# Altium PCB scanline.PcbDoc
Units mil, origin at the board's own origin, x right, y up, seen from the top; angles counter-clockwise.
Board outline 3818.9 x 866.14 mil, 2 copper layers (Top Layer, Bottom Layer); 129 components, 112 nets, 332 pads, 113 vias.
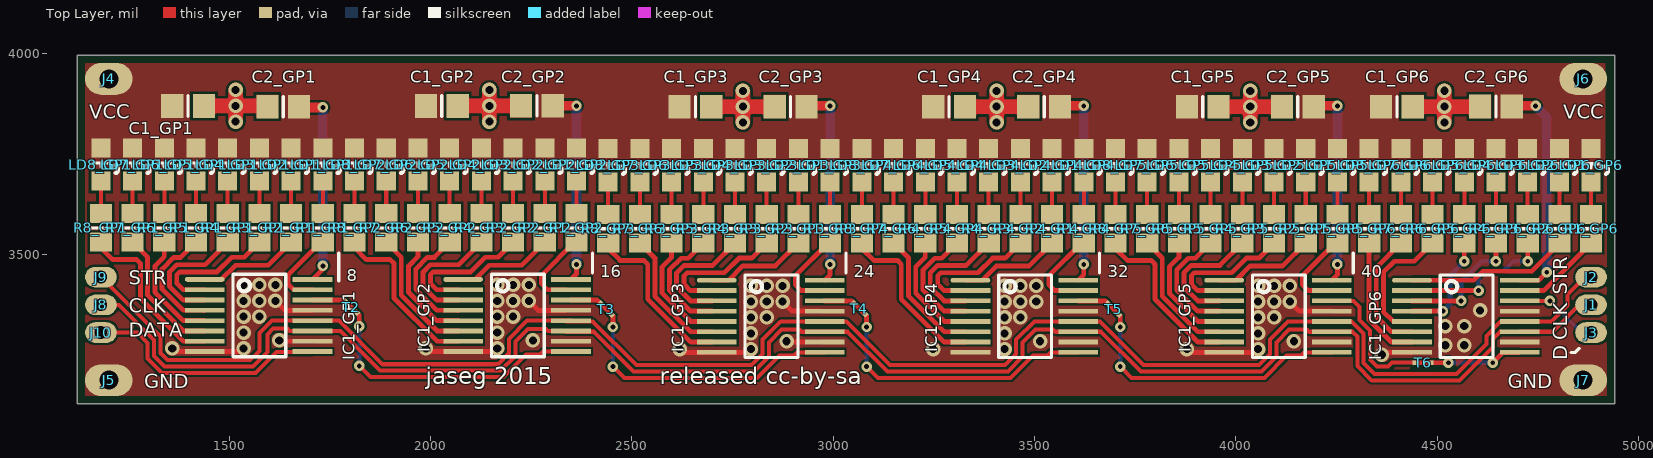
[diagram p0: Top Layer view]
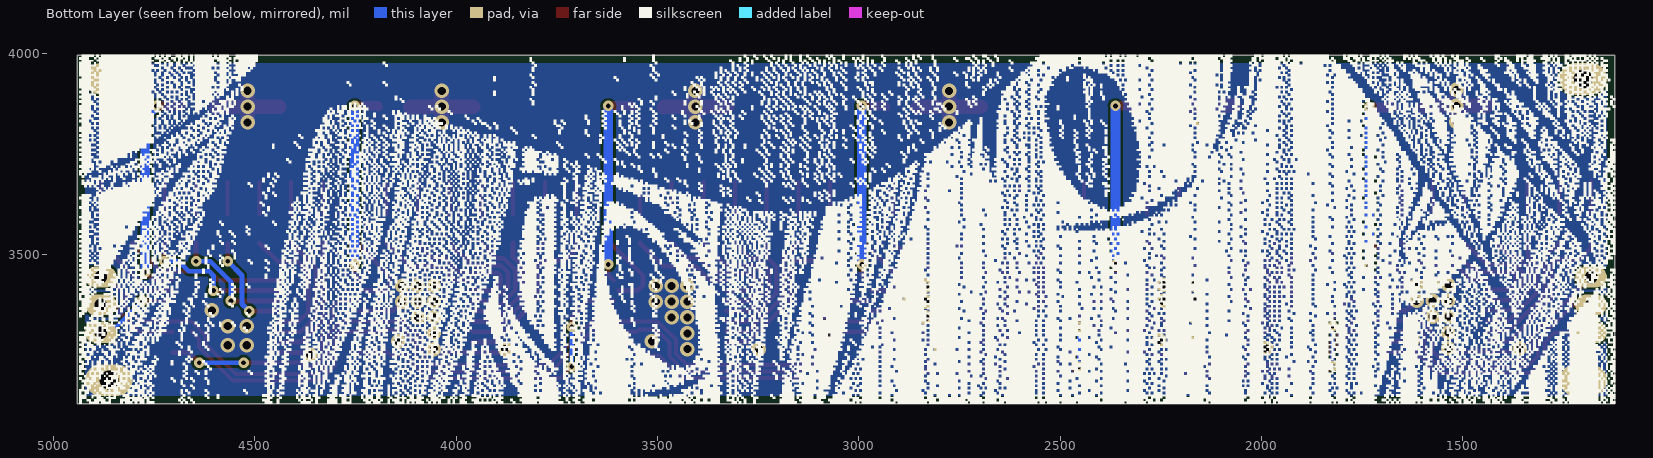
[diagram p1: Bottom Layer view, seen from below]

## Layer stack, top to bottom
Top Solder: solder mask 0.4, Solder Resist, Dk 3.5
Top Layer: signal copper 1.4
Dielectric 1: dielectric 12.6, FR-4, Dk 4.8
Bottom Layer: signal copper 1.4
Bottom Solder: solder mask 0.4, Solder Resist, Dk 3.5

## Board outline
1122.05,3129.92 1122.05,3996.06 4940.94,3996.06 4940.94,3129.92

## Design rules (kind name [scope] priority, off if disabled: settings)
Clearance "VGND Polygon clearance" [InNet('VGND') AND InPoly] p1: gap=20
Clearance [All] p2: gap=6
HoleSize [All] p1: absolutevalues=TRUE maxlimit=250 minlimit=11.81 maxpercent=80.000 minpercent=20.000
MinimumAnnularRing AnnularRing [All] p1: minimumring=6
MinimumSolderMaskSliver [All] p1 off: minsoldermaskwidth=3.94
PolygonConnect [All] p1: connectstyle=Direct reliefconductorwidth=20 reliefentries=4 polygonreliefangle="90 Angle" airgapwidth=6
RoomDefinition GP1 [InComponentClass('GP1')] p1: confinementstyle=ConfineIn formatcopy=FALSE lockcomponents=FALSE outline 1141.73,3149.61 1771.65,3149.61 1771.65,3976.38 1141.73,3976.38
RoomDefinition GP2 [InComponentClass('GP2')] p2: confinementstyle=ConfineIn formatcopy=FALSE lockcomponents=FALSE outline 1771.65,3149.61 2401.57,3149.61 2401.57,3976.38 1771.65,3976.38
RoomDefinition GP3 [InComponentClass('GP3')] p3: confinementstyle=ConfineIn formatcopy=TRUE lockcomponents=FALSE outline 2401.57,3147.64 3031.5,3147.64 3031.5,3974.41 2401.57,3974.41
RoomDefinition GP4 [InComponentClass('GP4')] p4: confinementstyle=ConfineIn formatcopy=TRUE lockcomponents=FALSE outline 3031.5,3147.64 3661.42,3147.64 3661.42,3974.41 3031.5,3974.41
RoomDefinition GP5 [InComponentClass('GP5')] p5: confinementstyle=ConfineIn formatcopy=TRUE lockcomponents=FALSE outline 3661.42,3147.64 4291.34,3147.64 4291.34,3974.41 3661.42,3974.41
RoomDefinition GP6 [InComponentClass('GP6')] p6: confinementstyle=ConfineIn formatcopy=TRUE lockcomponents=FALSE outline 4291.34,3147.64 4921.26,3147.64 4921.26,3974.41 4291.34,3974.41
RoomDefinition scanline [InComponentClass('scanline')] p7: confinementstyle=ConfineIn formatcopy=TRUE lockcomponents=FALSE outline 1141.73,3149.61 4921.26,3149.61 4921.26,3976.38 1141.73,3976.38
RoutingVias [All] p1: holewidth=28 width=50 viastyle="Through Hole" minholewidth=11.81 minwidth=23.62 maxholewidth=250 maxwidth=255.91
SilkToBoardRegionClearance [All] p1 off:
SilkToSilkClearance [All] p1 off: silktosilkclearance=6
SilkToSolderMaskClearance [IsPad] p1 off: minsilkscreentomaskgap=7 clearancetoexposedcopper=TRUE
SolderMaskExpansion [All] p1: expansion=5.12
Width SilkWidth [OnLayer('Top Overlay')] p1: maxlimit=1000 minlimit=6 preferedwidth=10
Width HighCurrentNets [InNetClass('Power')] p2: maxlimit=100 minlimit=10 preferedwidth=32 minimp=50.000000 maximp=50.000000 favimp=50.000000
Width [All] p3: maxlimit=50 minlimit=6 preferedwidth=10 minimp=50.000000 maximp=50.000000 favimp=50.000000
24 further rules are at their usual default settings.

## Classes and differential pairs
component class GP1: C1_GP1 C2_GP1 IC1_GP1 LD1_GP1 LD2_GP1 LD3_GP1 LD4_GP1 LD5_GP1 LD6_GP1 LD7_GP1 LD8_GP1 R1_GP1 R2_GP1 R3_GP1 R4_GP1 R5_GP1 R6_GP1 R7_GP1 R8_GP1
component class GP2: C1_GP2 C2_GP2 IC1_GP2 LD1_GP2 LD2_GP2 LD3_GP2 LD4_GP2 LD5_GP2 LD6_GP2 LD7_GP2 LD8_GP2 R1_GP2 R2_GP2 R3_GP2 R4_GP2 R5_GP2 R6_GP2 R7_GP2 R8_GP2
component class GP3: C1_GP3 C2_GP3 IC1_GP3 LD1_GP3 LD2_GP3 LD3_GP3 LD4_GP3 LD5_GP3 LD6_GP3 LD7_GP3 LD8_GP3 R1_GP3 R2_GP3 R3_GP3 R4_GP3 R5_GP3 R6_GP3 R7_GP3 R8_GP3
component class GP4: C1_GP4 C2_GP4 IC1_GP4 LD1_GP4 LD2_GP4 LD3_GP4 LD4_GP4 LD5_GP4 LD6_GP4 LD7_GP4 LD8_GP4 R1_GP4 R2_GP4 R3_GP4 R4_GP4 R5_GP4 R6_GP4 R7_GP4 R8_GP4
component class GP5: C1_GP5 C2_GP5 IC1_GP5 LD1_GP5 LD2_GP5 LD3_GP5 LD4_GP5 LD5_GP5 LD6_GP5 LD7_GP5 LD8_GP5 R1_GP5 R2_GP5 R3_GP5 R4_GP5 R5_GP5 R6_GP5 R7_GP5 R8_GP5
component class GP6: C1_GP6 C2_GP6 IC1_GP6 LD1_GP6 LD2_GP6 LD3_GP6 LD4_GP6 LD5_GP6 LD6_GP6 LD7_GP6 LD8_GP6 R1_GP6 R2_GP6 R3_GP6 R4_GP6 R5_GP6 R6_GP6 R7_GP6 R8_GP6
channel class led-group: GP1 GP2 GP3 GP4 GP5 GP6 GP7 GP8 GP9 GP10 GP11 GP12 GP13
component class scanline: J1 J2 J3 J4 J5 J6 J7 J8 J9 J10 T2 T3 T4 T5 T6
net class C[1..6]: C1 C2 C3 C4 C5 C6
net class K[1..6]: K1 K2 K3 K4 K5 K6

## Components (designator, comment, footprint, x,y, rotation, side; value= is the part's Value field where it differs from the comment)
C1_GP1 "Cap" 6-0805_M 1397.8,3869.95 r180 top (schematic designator C1)
C1_GP2 "Cap" 6-0805_M 2027.72,3869.95 r180 top (schematic designator C1)
C1_GP3 "Cap" 6-0805_M 2657.64,3867.98 r180 top (schematic designator C1)
C1_GP4 "Cap" 6-0805_M 3287.56,3867.98 r180 top (schematic designator C1)
C1_GP5 "Cap" 6-0805_M 3917.48,3867.98 r180 top (schematic designator C1)
C1_GP6 "Cap" 6-0805_M 4399.76,3868.11 r180 top (schematic designator C1)
C2_GP1 "Cap" 6-0805_M 1633.86,3868.11 r0 top (schematic designator C2)
C2_GP2 "Cap" 6-0805_M 2263.78,3870.08 r0 top (schematic designator C2)
C2_GP3 "Cap" 6-0805_M 2893.7,3868.11 r0 top (schematic designator C2)
C2_GP4 "Cap" 6-0805_M 3523.62,3868.11 r0 top (schematic designator C2)
C2_GP5 "Cap" 6-0805_M 4153.54,3868.11 r0 top (schematic designator C2)
C2_GP6 "Cap" 6-0805_M 4645.67,3868.24 r0 top (schematic designator C2)
IC1_GP1 "74HC595" TSSOP16 1427.17,3438.98 r0 top (schematic designator IC1)
IC1_GP2 "74HC595" TSSOP16 2068.9,3438.98 r0 top (schematic designator IC1)
IC1_GP3 "74HC595" TSSOP16 2698.82,3437.01 r0 top (schematic designator IC1)
IC1_GP4 "74HC595" TSSOP16 3328.74,3437.01 r0 top (schematic designator IC1)
IC1_GP5 "74HC595" TSSOP16 3958.66,3437.01 r0 top (schematic designator IC1)
IC1_GP6 "74HC595" TSSOP16 4425.2,3437.01 r0 top (schematic designator IC1)
J1 "CLK" CONN_PAD#1 4881.89,3362.2 r90 top
J2 "STR" CONN_PAD#2 4881.89,3429.13 r90 top
J3 "D" CONN_PAD#3 4881.89,3275.59 r90 top
J4 "DATA" CONN_PAD#4 1200.79,3937.01 r270 top
J5 "GND" CONN_PAD#4 1200.79,3188.98 r270 top
J6 "VCC" CONN_PAD#4 4862.2,3937.01 r90 top
J7 "GND" CONN_PAD#4 4862.2,3188.98 r90 top
J8 "CLK" CONN_PAD#5 1181.1,3375.98 r90 top
J9 "STR" CONN_PAD#5 1181.1,3444.88 r90 top
J10 "VCC" CONN_PAD#5 1181.1,3307.09 r270 top
LD1_GP1 "UV-LED" 0805-LED 1732.28,3724.41 r270 top (schematic designator LD1)
LD1_GP2 "UV-LED" 0805-LED 2362.2,3724.41 r270 top (schematic designator LD1)
LD1_GP3 "UV-LED" 0805-LED 2992.13,3722.44 r270 top (schematic designator LD1)
LD1_GP4 "UV-LED" 0805-LED 3622.05,3722.44 r270 top (schematic designator LD1)
LD1_GP5 "UV-LED" 0805-LED 4251.97,3722.44 r270 top (schematic designator LD1)
LD1_GP6 "UV-LED" 0805-LED 4881.89,3722.44 r270 top (schematic designator LD1)
LD2_GP1 "UV-LED" 0805-LED 1653.54,3724.41 r270 top (schematic designator LD2)
LD2_GP2 "UV-LED" 0805-LED 2283.46,3724.41 r270 top (schematic designator LD2)
LD2_GP3 "UV-LED" 0805-LED 2913.39,3722.44 r270 top (schematic designator LD2)
LD2_GP4 "UV-LED" 0805-LED 3543.31,3722.44 r270 top (schematic designator LD2)
LD2_GP5 "UV-LED" 0805-LED 4173.23,3722.44 r270 top (schematic designator LD2)
LD2_GP6 "UV-LED" 0805-LED 4803.15,3722.44 r270 top (schematic designator LD2)
LD3_GP1 "UV-LED" 0805-LED 1574.8,3724.41 r270 top (schematic designator LD3)
LD3_GP2 "UV-LED" 0805-LED 2204.72,3724.41 r270 top (schematic designator LD3)
LD3_GP3 "UV-LED" 0805-LED 2834.65,3722.44 r270 top (schematic designator LD3)
LD3_GP4 "UV-LED" 0805-LED 3464.57,3722.44 r270 top (schematic designator LD3)
LD3_GP5 "UV-LED" 0805-LED 4094.49,3722.44 r270 top (schematic designator LD3)
LD3_GP6 "UV-LED" 0805-LED 4724.41,3722.44 r270 top (schematic designator LD3)
LD4_GP1 "UV-LED" 0805-LED 1496.06,3724.41 r270 top (schematic designator LD4)
LD4_GP2 "UV-LED" 0805-LED 2125.98,3724.41 r270 top (schematic designator LD4)
LD4_GP3 "UV-LED" 0805-LED 2755.91,3722.44 r270 top (schematic designator LD4)
LD4_GP4 "UV-LED" 0805-LED 3385.83,3722.44 r270 top (schematic designator LD4)
LD4_GP5 "UV-LED" 0805-LED 4015.75,3722.44 r270 top (schematic designator LD4)
LD4_GP6 "UV-LED" 0805-LED 4645.67,3722.44 r270 top (schematic designator LD4)
LD5_GP1 "UV-LED" 0805-LED 1417.32,3724.41 r270 top (schematic designator LD5)
LD5_GP2 "UV-LED" 0805-LED 2047.24,3724.41 r270 top (schematic designator LD5)
LD5_GP3 "UV-LED" 0805-LED 2677.17,3722.44 r270 top (schematic designator LD5)
LD5_GP4 "UV-LED" 0805-LED 3307.09,3722.44 r270 top (schematic designator LD5)
LD5_GP5 "UV-LED" 0805-LED 3937.01,3722.44 r270 top (schematic designator LD5)
LD5_GP6 "UV-LED" 0805-LED 4566.93,3722.44 r270 top (schematic designator LD5)
LD6_GP1 "UV-LED" 0805-LED 1338.58,3724.41 r270 top (schematic designator LD6)
LD6_GP2 "UV-LED" 0805-LED 1968.5,3724.41 r270 top (schematic designator LD6)
LD6_GP3 "UV-LED" 0805-LED 2598.43,3722.44 r270 top (schematic designator LD6)
LD6_GP4 "UV-LED" 0805-LED 3228.35,3722.44 r270 top (schematic designator LD6)
LD6_GP5 "UV-LED" 0805-LED 3858.27,3722.44 r270 top (schematic designator LD6)
LD6_GP6 "UV-LED" 0805-LED 4488.19,3722.44 r270 top (schematic designator LD6)
LD7_GP1 "UV-LED" 0805-LED 1259.84,3724.41 r270 top (schematic designator LD7)
LD7_GP2 "UV-LED" 0805-LED 1889.76,3724.41 r270 top (schematic designator LD7)
LD7_GP3 "UV-LED" 0805-LED 2519.68,3722.44 r270 top (schematic designator LD7)
LD7_GP4 "UV-LED" 0805-LED 3149.61,3722.44 r270 top (schematic designator LD7)
LD7_GP5 "UV-LED" 0805-LED 3779.53,3722.44 r270 top (schematic designator LD7)
LD7_GP6 "UV-LED" 0805-LED 4409.45,3722.44 r270 top (schematic designator LD7)
LD8_GP1 "UV-LED" 0805-LED 1181.1,3724.41 r270 top (schematic designator LD8)
LD8_GP2 "UV-LED" 0805-LED 1811.02,3724.41 r270 top (schematic designator LD8)
LD8_GP3 "UV-LED" 0805-LED 2440.94,3722.44 r270 top (schematic designator LD8)
LD8_GP4 "UV-LED" 0805-LED 3070.87,3722.44 r270 top (schematic designator LD8)
LD8_GP5 "UV-LED" 0805-LED 3700.79,3722.44 r270 top (schematic designator LD8)
LD8_GP6 "UV-LED" 0805-LED 4330.71,3722.44 r270 top (schematic designator LD8)
R1_GP1 "" 6-0805_N 1732.28,3566.93 r90 top (schematic designator R1)
R1_GP2 "" 6-0805_N 2362.2,3566.93 r90 top (schematic designator R1)
R1_GP3 "" 6-0805_N 2992.13,3564.96 r90 top (schematic designator R1)
R1_GP4 "" 6-0805_N 3622.05,3564.96 r90 top (schematic designator R1)
R1_GP5 "" 6-0805_N 4251.97,3564.96 r90 top (schematic designator R1)
R1_GP6 "" 6-0805_N 4881.89,3564.96 r90 top (schematic designator R1)
R2_GP1 "" 6-0805_N 1653.54,3566.93 r90 top (schematic designator R2)
R2_GP2 "" 6-0805_N 2283.46,3566.93 r90 top (schematic designator R2)
R2_GP3 "" 6-0805_N 2913.39,3564.96 r90 top (schematic designator R2)
R2_GP4 "" 6-0805_N 3543.31,3564.96 r90 top (schematic designator R2)
R2_GP5 "" 6-0805_N 4173.23,3564.96 r90 top (schematic designator R2)
R2_GP6 "" 6-0805_N 4803.15,3564.96 r90 top (schematic designator R2)
R3_GP1 "" 6-0805_N 1574.8,3566.93 r90 top (schematic designator R3)
R3_GP2 "" 6-0805_N 2204.72,3566.93 r90 top (schematic designator R3)
R3_GP3 "" 6-0805_N 2834.65,3564.96 r90 top (schematic designator R3)
R3_GP4 "" 6-0805_N 3464.57,3564.96 r90 top (schematic designator R3)
R3_GP5 "" 6-0805_N 4094.49,3564.96 r90 top (schematic designator R3)
R3_GP6 "" 6-0805_N 4724.41,3564.96 r90 top (schematic designator R3)
R4_GP1 "" 6-0805_N 1496.06,3566.93 r90 top (schematic designator R4)
R4_GP2 "" 6-0805_N 2125.98,3566.93 r90 top (schematic designator R4)
R4_GP3 "" 6-0805_N 2755.91,3564.96 r90 top (schematic designator R4)
R4_GP4 "" 6-0805_N 3385.83,3564.96 r90 top (schematic designator R4)
R4_GP5 "" 6-0805_N 4015.75,3564.96 r90 top (schematic designator R4)
R4_GP6 "" 6-0805_N 4645.67,3564.96 r90 top (schematic designator R4)
R5_GP1 "" 6-0805_N 1417.32,3566.93 r90 top (schematic designator R5)
R5_GP2 "" 6-0805_N 2047.24,3566.93 r90 top (schematic designator R5)
R5_GP3 "" 6-0805_N 2677.17,3564.96 r90 top (schematic designator R5)
R5_GP4 "" 6-0805_N 3307.09,3564.96 r90 top (schematic designator R5)
R5_GP5 "" 6-0805_N 3937.01,3564.96 r90 top (schematic designator R5)
R5_GP6 "" 6-0805_N 4566.93,3564.96 r90 top (schematic designator R5)
R6_GP1 "" 6-0805_N 1338.58,3566.93 r90 top (schematic designator R6)
R6_GP2 "" 6-0805_N 1968.5,3566.93 r90 top (schematic designator R6)
R6_GP3 "" 6-0805_N 2598.43,3564.96 r90 top (schematic designator R6)
R6_GP4 "" 6-0805_N 3228.35,3564.96 r90 top (schematic designator R6)
R6_GP5 "" 6-0805_N 3858.27,3564.96 r90 top (schematic designator R6)
R6_GP6 "" 6-0805_N 4488.19,3564.96 r90 top (schematic designator R6)
R7_GP1 "" 6-0805_N 1259.84,3566.93 r90 top (schematic designator R7)
R7_GP2 "" 6-0805_N 1889.76,3566.93 r90 top (schematic designator R7)
R7_GP3 "" 6-0805_N 2519.68,3564.96 r90 top (schematic designator R7)
R7_GP4 "" 6-0805_N 3149.61,3564.96 r90 top (schematic designator R7)
R7_GP5 "" 6-0805_N 3779.53,3564.96 r90 top (schematic designator R7)
R7_GP6 "" 6-0805_N 4409.45,3564.96 r90 top (schematic designator R7)
R8_GP1 "" 6-0805_N 1181.1,3566.93 r90 top (schematic designator R8)
R8_GP2 "" 6-0805_N 1811.02,3566.93 r90 top (schematic designator R8)
R8_GP3 "" 6-0805_N 2440.94,3564.96 r90 top (schematic designator R8)
R8_GP4 "" 6-0805_N 3070.87,3564.96 r90 top (schematic designator R8)
R8_GP5 "" 6-0805_N 3700.79,3564.96 r90 top (schematic designator R8)
R8_GP6 "" 6-0805_N 4330.71,3564.96 r90 top (schematic designator R8)
T2 "NETTIE" NETTIE 1803.15,3370.08 r315 top net-tie
T3 "NETTIE" NETTIE 2436.02,3365.16 r315 top net-tie
T4 "NETTIE" NETTIE 3064.96,3366.14 r315 top net-tie
T5 "NETTIE" NETTIE 3695.87,3365.16 r315 top net-tie
T6 "NETTIE" NETTIE 4464.57,3232.28 r0 top net-tie

## Footprints (in the part's own frame and the unit in brackets; to place one, negate y for a bottom-side part, rotate by r counter-clockwise, add the part's x,y. Pads: shape width x height; smd on the part's side, far side on the other; paste and mask are expansions set on the pad)
6-0805_M [mm] "Chip Resistor, Body 2.0x1.2mm, IPC Low Density"
  rect 1.4x1.5 smd: 1(-1,0) 2(1,0)
  silkscreen extent 0,-0.65 0,0.65, body extent -1.07,-0.7 1.07,0.7, height 0.7
6-0805_N [mm] "Chip Resistor, Body 2.0x1.2mm, IPC Medium Density"
  rect 1.2x1.4 smd: 1(-0.9,0) 2(0.9,0)
  silkscreen extent 0,-0.6 0,0.6, body extent -1.07,-0.7 1.07,0.7, height 0.7
0805-LED [mm]
  rect 1.2x1.2 smd: A(-1.05,0) K(1.05,0)
  silkscreen extent -0.1,-0.5 0.55,1.07
CONN_PAD#1 [mm]
  oval 1.3x2 hole 0.8: 1(0.35,0)
CONN_PAD#2 [mm]
  oval 1.3x2 hole 0.8: 1(0.4,0)
CONN_PAD#3 [mm]
  oval 1.3x2 hole 0.8: 1(0.8,0)
CONN_PAD#4 [mm]
  oval 2x3 hole 1.2: 1(0,0)
CONN_PAD#5 [mm]
  oval 1.3x2 hole 0.8: 1(0,0)
NETTIE [mil]
  rect 12x12 smd: 1(-19.69,0) 2(19.69,0)
  Top Layer region: -19.69,-6 19.68,-6 19.69,6 -19.68,6
TSSOP16 [mm]
  oval 2.5x0.3 smd: 1(0.3,0)
  rect 2.5x0.3 smd: 2(0.3,-0.65) 3(0.3,-1.3) 4(0.3,-1.95) 5(0.3,-2.6) 6(0.3,-3.25) 7(0.3,-3.9) 8(0.3,-4.55) 9(7.1,-4.55) 10(7.1,-3.9) 11(7.1,-3.25) 12(7.1,-2.6) 13(7.1,-1.95) 14(7.1,-1.3) 15(7.1,-0.65) 16(7.1,0)
  silkscreen extent 2.08,-4.88 5.42,0.33

## Part data
C1_GP1 C1_GP2 C1_GP3 C1_GP4 C1_GP5 C1_GP6 C2_GP1 C2_GP2 C2_GP3 C2_GP4 C2_GP5 C2_GP6: "Capacitor"
IC1_GP1 IC1_GP2 IC1_GP3 IC1_GP4 IC1_GP5 IC1_GP6: library part Component_1, "74HC595 8-bit latched SIPO shift register"
J1 J2 J3 J4 J5 J6 J7 J8 J9 J10: library part CONN_PAD
R1_GP1 R1_GP2 R1_GP3 R1_GP4 R1_GP5 R1_GP6 R2_GP1 R2_GP2 R2_GP3 R2_GP4 R2_GP5 R2_GP6 R3_GP1 R3_GP2 R3_GP3 R3_GP4 R3_GP5 R3_GP6 R4_GP1 R4_GP2 R4_GP3 R4_GP4 R4_GP5 R4_GP6 R5_GP1 R5_GP2 R5_GP3 R5_GP4 R5_GP5 R5_GP6 R6_GP1 R6_GP2 R6_GP3 R6_GP4 R6_GP5 R6_GP6 R7_GP1 R7_GP2 R7_GP3 R7_GP4 R7_GP5 R7_GP6 R8_GP1 R8_GP2 R8_GP3 R8_GP4 R8_GP5 R8_GP6: library part Res2, "Resistor"

## Via types
v1: diameter 36, hole 20, Top Layer to Bottom Layer, tented both sides, 84 vias
v2: diameter 26, hole 12, Top Layer to Bottom Layer, tented both sides, 29 vias

## Nets (pads, with @x,y where several pads share a name; then routed paths per layer and width w, separated by ;. In a path a pad name is that pad's centre, name@x,y a point inside that pad or via, vN(x,y) a via of type N, cw(c..) or ccw(c..) an arc to the next point about the centre after c; other vN are vias at no path point)
C1: IC1_GP1.14 T2.1 | length 84.1
  Top Layer w12: IC1_GP1.14 1785.43,3387.8 T2.1
C2: IC1_GP2.14 T3.1 | length 77.3
  Top Layer w12: IC1_GP2.14 2413.39,3387.8 T3.1
C3: IC1_GP3.14 T4.1 | length 75.1
  Top Layer w12: IC1_GP3.14 3045.28,3385.83 T4.1
C4: IC1_GP4.14 T5.1 | length 76.5
  Top Layer w12: IC1_GP4.14 3675.2,3385.83 T5.1
C5: IC1_GP5.14 T6.1 | length 338.9
  Top Layer w10: IC1_GP5.14 4291.34,3385.83 4307.09,3370.08 4307.09,3338.58 4333.2,3312.46 4333.2,3239.96 4350.19,3222.97 4377.95,3222.97 4387.27,3232.28 T6.1
C6: IC1_GP6.14 J3.1 | length 209.8
  Top Layer w10: IC1_GP6.14 v2(4779.53,3385.83)
  Bottom Layer w10: v2(4779.53,3385.83) 4858.27,3307.09 J3.1
CLK: IC1_GP1.11 IC1_GP2.11 IC1_GP3.11 IC1_GP4.11 IC1_GP5.11 IC1_GP6.11 J1.1 J8.1 | length 4451.4
  Top Layer w10: J8.1 1226.38,3375.98 1313.27,3289.09 1313.27,3249.08 1339.63,3222.72 1558.36,3222.72 1594.49,3258.85 1594.49,3302.5 1608.91,3316.93 1644.15,3316.93 1650.05,3311.02 IC1_GP1.11 1775.59,3311.02 1874.27,3212.35 2173.62,3212.35 2210.35,3249.08 2210.35,3284.83 2241.92,3316.4 2285.96,3316.4 2291.34,3311.02 IC1_GP2.11 ; IC1_GP2.11@2336.61,3309.05 2405.51,3309.05 2504.19,3210.38 2803.55,3210.38 2840.28,3247.11 2840.28,3282.86 2871.85,3314.43 2915.88,3314.43 2921.26,3309.06 IC1_GP3.11 ; IC1_GP3.11@2966.54,3309.05 3035.43,3309.05 3134.11,3210.38 3433.47,3210.38 3470.2,3247.11 3470.2,3282.86 3501.77,3314.43 3545.8,3314.43 3551.18,3309.06 IC1_GP4.11 ; IC1_GP4.11@3596.46,3309.05 3665.35,3309.05 3764.03,3210.38 4063.39,3210.38 4100.12,3247.11 4100.12,3282.86 4131.69,3314.43 4175.72,3314.43 4181.1,3309.06 IC1_GP5.11 4289.37,3309.05 4301.2,3297.22 4301.2,3224.41 4337.14,3188.47 4554.61,3188.47 4637.8,3271.65 4637.8,3291.34 4655.51,3309.05 ; IC1_GP6.11 4785.43,3309.05 4852.36,3375.98 J1.1
GND: C1_GP1.1 C1_GP2.1 C1_GP3.1 C1_GP4.1 C1_GP5.1 C1_GP6.1 C2_GP1.1 C2_GP2.1 C2_GP3.1 C2_GP4.1 C2_GP5.1 C2_GP6.1 IC1_GP1.8 IC1_GP1.10 IC1_GP1.13 IC1_GP2.8 IC1_GP2.10 IC1_GP2.13 IC1_GP3.8 IC1_GP3.10 IC1_GP3.13 IC1_GP4.8 IC1_GP4.10 IC1_GP4.13 IC1_GP5.8 IC1_GP5.10 IC1_GP5.13 IC1_GP6.8 IC1_GP6.10 IC1_GP6.13 J5.1 J7.1 | length 2765.3
  Top Layer w12: v1(1358.27,3267.72) 1366.14,3259.84 IC1_GP1.8 v1@1527.56,3259.84 ; v1(1614.17,3385.83) 1637.8,3362.2 IC1_GP1.13 ; v1(1624.02,3287.4) 1625.98,3285.43 IC1_GP1.10 ; v1(1988.19,3267.72) 1996.06,3259.84 2068.9,3259.84 v1@2157.48,3259.84 ; v1(2244.09,3385.83) 2267.72,3362.2 IC1_GP2.13@2336.61,3362.2 ; v1(2618.11,3265.75) 2625.98,3257.87 2698.82,3257.87 v1@2787.4,3257.87 ; v1(2874.02,3383.86) 2897.64,3360.24 IC1_GP3.13@2966.54,3360.24 ; v1@2885.83,3283.46 IC1_GP3.10@2966.54,3283.46 ; v1(3877.95,3265.75) 3885.83,3257.87 3958.66,3257.87 v1@4047.24,3257.87 ; v1(4133.86,3383.86) 4157.48,3360.24 IC1_GP5.13 ; v1@4368.11,3257.87 IC1_GP6.8
  Top Layer w36: C1_GP1.1 v1(1515.75,3869.95) ; v1(1515.75,3830.71) v1(1515.75,3869.95) ; v1(1515.75,3909.45) v1(1515.75,3869.95) ; C2_GP1.1 1592.65,3869.95 v1(1515.75,3869.95) ; C1_GP2.1 v1(2145.67,3869.95) ; v1(2145.67,3830.71) v1(2145.67,3869.95) ; v1(2145.67,3909.45) v1(2145.67,3869.95) ; C2_GP2.1@2224.41,3868.11 2222.57,3869.95 v1(2145.67,3869.95) ; C1_GP3.1 v1(2775.59,3867.98) ; v1(2775.59,3828.74) v1(2775.59,3867.98) ; v1(2775.59,3907.48) v1(2775.59,3867.98) ; C2_GP3.1@2854.33,3866.14 2852.49,3867.98 v1(2775.59,3867.98) ; C1_GP4.1 v1(3405.51,3867.98) ; v1(3405.51,3828.74) v1(3405.51,3867.98) ; v1(3405.51,3907.48) v1(3405.51,3867.98) ; C2_GP4.1@3484.25,3866.14 3482.41,3867.98 v1(3405.51,3867.98) ; C1_GP5.1 v1(4035.43,3867.98) ; v1(4035.43,3828.74) v1(4035.43,3867.98) ; v1(4035.43,3907.48) v1(4035.43,3867.98) ; C2_GP5.1@4114.17,3866.14 4112.33,3867.98 v1(4035.43,3867.98) ; C1_GP6.1 v1(4517.72,3868.11) ; v1(4517.72,3828.87) v1(4517.72,3868.11) ; v1(4517.72,3907.61) v1(4517.72,3868.11) ; C2_GP6.1@4596.46,3866.27 4594.61,3868.11 v1(4517.72,3868.11)
  other v1: 4362.2,3251.97 2795.28,3265.75 3248.03,3265.75 3425.2,3265.75 4055.12,3265.75 1535.43,3267.72 2165.35,3267.72 4519.69,3275.59 4566.93,3275.59 2883.86,3285.43 3513.78,3285.43 4143.7,3285.43 2253.94,3287.4 2795.28,3305.12 3425.2,3305.12 4055.12,3305.12 1535.43,3307.09 2165.35,3307.09 4519.69,3322.83 4566.93,3322.83 2795.28,3344.49 2834.65,3344.49 3425.2,3344.49 3464.57,3344.49 4055.12,3344.49 4094.49,3344.49 1535.43,3346.46 1574.8,3346.46 2165.35,3346.46 2204.72,3346.46 4606.3,3362.2 2795.28,3383.86 2834.65,3383.86 3425.2,3383.86 3464.57,3383.86 3503.94,3383.86 4055.12,3383.86 4094.49,3383.86 1535.43,3385.83 1574.8,3385.83 2165.35,3385.83 2204.72,3385.83 2795.28,3423.23 2834.65,3423.23 2874.02,3423.23 3425.2,3423.23 3464.57,3423.23 3503.94,3423.23 4055.12,3423.23 4094.49,3423.23 4133.86,3423.23 1535.43,3425.2 1574.8,3425.2 1614.17,3425.2 2165.35,3425.2 2204.72,3425.2 2244.09,3425.2
K1: IC1_GP1.9 J10.1 | length 612
  Top Layer w10: J10.1 1271.65,3307.09 1297.27,3281.47 1297.27,3242.45 1333,3206.72 1564.98,3206.72 1616.67,3258.4 1705.25,3258.4 IC1_GP1.9
K2: IC1_GP2.9 T2.2 | length 697.7
  Top Layer w10: v2(1822.83,3224.41) 1850.9,3196.35 2180.6,3196.35 2236.22,3251.97 2271.65,3251.97 2279.53,3259.84 IC1_GP2.9
  Top Layer w12: T2.2 1822.83,3350.39 v2(1822.83,3322.83)
  Bottom Layer w10: v2(1822.83,3224.41) v2(1822.83,3322.83)
K3: IC1_GP3.9 T3.2 | length 697.7
  Top Layer w10: v2(2452.76,3222.44) 2480.82,3194.38 2810.52,3194.38 2866.14,3250 2901.57,3250 2909.45,3257.87 IC1_GP3.9
  Top Layer w12: T3.2@2446.99,3354.19 2452.76,3348.43 v2(2452.76,3320.87)
  Bottom Layer w10: v2(2452.76,3222.44) v2(2452.76,3320.87)
K4: IC1_GP4.9 T4.2 | length 697.7
  Top Layer w10: v2(3082.68,3222.44) 3110.74,3194.38 3440.44,3194.38 3496.06,3250 3531.5,3250 3539.37,3257.87 IC1_GP4.9
  Top Layer w12: T4.2@3076.91,3354.19 3082.68,3348.43 v2(3082.68,3320.87)
  Bottom Layer w10: v2(3082.68,3222.44) v2(3082.68,3320.87)
K5: IC1_GP5.9 T5.2 | length 697.7
  Top Layer w10: v2(3712.6,3222.44) 3740.66,3194.38 4070.36,3194.38 4125.98,3250 4161.42,3250 4169.29,3257.87 IC1_GP5.9
  Top Layer w12: T5.2@3706.83,3354.19 3712.6,3348.43 v2(3712.6,3320.87)
  Bottom Layer w10: v2(3712.6,3222.44) v2(3712.6,3320.87)
K6: IC1_GP6.9 T6.2 | length 231.1
  Top Layer w12: T6.2 4496.06,3232.28 v2(4527.56,3232.28) ; v2(4637.8,3232.28) 4663.39,3257.87 IC1_GP6.9
  Bottom Layer w12: v2(4527.56,3232.28) v2(4637.8,3232.28)
NetIC1_GP1_1: IC1_GP1.1 R2_GP1.1 | length 252.9
  Top Layer w12: IC1_GP1.1 1480.32,3438.98 1515.75,3474.41 1596.46,3474.41 R2_GP1.1
NetIC1_GP1_2: IC1_GP1.2 R3_GP1.1 | length 336
  Top Layer w12: IC1_GP1.2 1385.27,3413.39 1369.52,3429.13 1369.52,3450.23 1376.95,3457.66 1469.47,3457.66 1505.91,3494.09 1537.4,3494.09 R3_GP1.1
NetIC1_GP1_3: IC1_GP1.3 R4_GP1.1 | length 313
  Top Layer w12: IC1_GP1.3 1385.41,3387.8 1351.11,3422.09 1351.11,3457.27 1369.5,3475.66 1440.23,3475.66 R4_GP1.1
NetIC1_GP1_4: IC1_GP1.4 R5_GP1.1 | length 289.5
  Top Layer w12: R5_GP1.1 1379.49,3493.66 1362.04,3493.66 1333.11,3464.73 1333.11,3414.64 1385.45,3362.3 1437.33,3362.3 1437.43,3362.2 IC1_GP1.4
NetIC1_GP1_5: IC1_GP1.5 R6_GP1.1 | length 287.1
  Top Layer w12: R6_GP1.1 1338.58,3495.66 1315.11,3472.19 1315.11,3407.18 1385.68,3336.61 IC1_GP1.5
NetIC1_GP1_6: IC1_GP1.6 R7_GP1.1 | length 325.8
  Top Layer w12: R7_GP1.1 1297.11,3494.23 1297.11,3399.72 1385.81,3311.02 IC1_GP1.6
NetIC1_GP1_7: IC1_GP1.7 R8_GP1.1 | length 418.5
  Top Layer w12: R8_GP1.1 1181.1,3517.72 1210.63,3488.19 1269.68,3488.19 1279.11,3478.76 1279.11,3392.27 1385.95,3285.43 IC1_GP1.7
NetIC1_GP1_15: IC1_GP1.15 R1_GP1.1 | length 209.7
  Top Layer w12: IC1_GP1.15 1660.19,3413.39 1645.48,3428.1 1645.48,3449.85 1727.12,3531.5 R1_GP1.1
NetIC1_GP2_1: IC1_GP2.1 R2_GP2.1 | length 252.9
  Top Layer w12: IC1_GP2.1@2068.9,3438.98 2110.24,3438.98 2145.67,3474.41 2226.38,3474.41 R2_GP2.1
NetIC1_GP2_2: IC1_GP2.2 R3_GP2.1 | length 336
  Top Layer w12: IC1_GP2.2@2068.9,3413.39 2015.19,3413.39 1999.45,3429.13 1999.45,3450.23 2006.87,3457.66 2099.39,3457.66 2135.83,3494.09 2167.32,3494.09 R3_GP2.1
NetIC1_GP2_3: IC1_GP2.3 R4_GP2.1 | length 313
  Top Layer w12: IC1_GP2.3@2068.9,3387.8 2015.33,3387.8 1981.03,3422.09 1981.03,3457.27 1999.42,3475.66 2070.15,3475.66 R4_GP2.1
NetIC1_GP2_4: IC1_GP2.4 R5_GP2.1 | length 289.5
  Top Layer w12: R5_GP2.1 2009.41,3493.66 1991.96,3493.66 1963.03,3464.73 1963.03,3414.64 2015.37,3362.3 2067.25,3362.3 2067.35,3362.2 IC1_GP2.4@2068.9,3362.2
NetIC1_GP2_5: IC1_GP2.5 R6_GP2.1 | length 287.1
  Top Layer w12: R6_GP2.1 1968.5,3495.66 1945.03,3472.19 1945.03,3407.18 2015.6,3336.61 IC1_GP2.5@2068.9,3336.61
NetIC1_GP2_6: IC1_GP2.6 R7_GP2.1 | length 325.8
  Top Layer w12: R7_GP2.1 1927.03,3494.23 1927.03,3399.72 2015.73,3311.02 IC1_GP2.6@2068.9,3311.02
NetIC1_GP2_7: IC1_GP2.7 R8_GP2.1 | length 418.5
  Top Layer w12: R8_GP2.1 1811.02,3517.72 1840.55,3488.19 1899.61,3488.19 1909.03,3478.76 1909.03,3392.27 2015.87,3285.43 IC1_GP2.7@2068.9,3285.43
NetIC1_GP2_15: IC1_GP2.15 R1_GP2.1 | length 209.7
  Top Layer w12: IC1_GP2.15@2336.61,3413.39 2290.12,3413.39 2275.4,3428.1 2275.4,3449.85 2357.05,3531.5 R1_GP2.1
NetIC1_GP3_1: IC1_GP3.1 R2_GP3.1 | length 252.9
  Top Layer w12: IC1_GP3.1@2698.82,3437.01 2740.16,3437.01 2775.59,3472.44 2856.3,3472.44 R2_GP3.1
NetIC1_GP3_2: IC1_GP3.2 R3_GP3.1 | length 336
  Top Layer w12: IC1_GP3.2@2698.82,3411.42 2645.11,3411.42 2629.37,3427.17 2629.37,3448.26 2636.8,3455.69 2729.32,3455.69 2765.75,3492.13 2797.24,3492.13 R3_GP3.1
NetIC1_GP3_3: IC1_GP3.3 R4_GP3.1 | length 313
  Top Layer w12: IC1_GP3.3@2698.82,3385.83 2645.25,3385.83 2610.95,3420.12 2610.95,3455.31 2629.34,3473.69 2700.07,3473.69 R4_GP3.1
NetIC1_GP3_4: IC1_GP3.4 R5_GP3.1 | length 289.5
  Top Layer w12: R5_GP3.1 2639.33,3491.69 2621.88,3491.69 2592.95,3462.76 2592.95,3412.67 2645.29,3360.33 2697.18,3360.33 2697.27,3360.24 IC1_GP3.4@2698.82,3360.24
NetIC1_GP3_5: IC1_GP3.5 R6_GP3.1 | length 287.1
  Top Layer w12: R6_GP3.1 2598.43,3493.69 2574.95,3470.22 2574.95,3405.21 2645.52,3334.65 IC1_GP3.5@2698.82,3334.65
NetIC1_GP3_6: IC1_GP3.6 R7_GP3.1 | length 325.8
  Top Layer w12: R7_GP3.1 2556.95,3492.26 2556.95,3397.76 2645.65,3309.05 IC1_GP3.6@2698.82,3309.05
NetIC1_GP3_7: IC1_GP3.7 R8_GP3.1 | length 418.5
  Top Layer w12: R8_GP3.1 2440.94,3515.75 2470.47,3486.22 2529.53,3486.22 2538.95,3476.8 2538.95,3390.3 2645.79,3283.46 IC1_GP3.7@2698.82,3283.46
NetIC1_GP3_15: IC1_GP3.15 R1_GP3.1 | length 209.7
  Top Layer w12: IC1_GP3.15@2966.54,3411.42 2920.04,3411.42 2905.32,3426.13 2905.32,3447.88 2986.97,3529.53 R1_GP3.1
NetIC1_GP4_1: IC1_GP4.1 R2_GP4.1 | length 252.9
  Top Layer w12: IC1_GP4.1@3328.74,3437.01 3370.08,3437.01 3405.51,3472.44 3486.22,3472.44 R2_GP4.1
NetIC1_GP4_2: IC1_GP4.2 R3_GP4.1 | length 336
  Top Layer w12: IC1_GP4.2@3328.74,3411.42 3275.04,3411.42 3259.29,3427.17 3259.29,3448.26 3266.72,3455.69 3359.24,3455.69 3395.67,3492.13 3427.17,3492.13 R3_GP4.1
NetIC1_GP4_3: IC1_GP4.3 R4_GP4.1 | length 313
  Top Layer w12: IC1_GP4.3@3328.74,3385.83 3275.17,3385.83 3240.87,3420.12 3240.87,3455.31 3259.26,3473.69 3329.99,3473.69 R4_GP4.1
NetIC1_GP4_4: IC1_GP4.4 R5_GP4.1 | length 289.5
  Top Layer w12: R5_GP4.1 3269.25,3491.69 3251.8,3491.69 3222.87,3462.76 3222.87,3412.67 3275.21,3360.33 3327.1,3360.33 3327.19,3360.24 IC1_GP4.4@3328.74,3360.24
NetIC1_GP4_5: IC1_GP4.5 R6_GP4.1 | length 287.1
  Top Layer w12: R6_GP4.1 3228.35,3493.69 3204.87,3470.22 3204.87,3405.21 3275.44,3334.65 IC1_GP4.5@3328.74,3334.65
NetIC1_GP4_6: IC1_GP4.6 R7_GP4.1 | length 325.8
  Top Layer w12: R7_GP4.1 3186.87,3492.26 3186.87,3397.76 3275.58,3309.05 IC1_GP4.6@3328.74,3309.05
NetIC1_GP4_7: IC1_GP4.7 R8_GP4.1 | length 418.5
  Top Layer w12: R8_GP4.1 3070.87,3515.75 3100.39,3486.22 3159.45,3486.22 3168.87,3476.8 3168.87,3390.3 3275.71,3283.46 IC1_GP4.7@3328.74,3283.46
NetIC1_GP4_15: IC1_GP4.15 R1_GP4.1 | length 209.7
  Top Layer w12: IC1_GP4.15@3596.46,3411.42 3549.96,3411.42 3535.24,3426.13 3535.24,3447.88 3616.89,3529.53 R1_GP4.1
NetIC1_GP5_1: IC1_GP5.1 R2_GP5.1 | length 252.9
  Top Layer w12: IC1_GP5.1@3958.66,3437.01 4000,3437.01 4035.43,3472.44 4116.14,3472.44 R2_GP5.1
NetIC1_GP5_2: IC1_GP5.2 R3_GP5.1 | length 336
  Top Layer w12: IC1_GP5.2@3958.66,3411.42 3904.96,3411.42 3889.21,3427.17 3889.21,3448.26 3896.64,3455.69 3989.16,3455.69 4025.59,3492.13 4057.09,3492.13 R3_GP5.1
NetIC1_GP5_3: IC1_GP5.3 R4_GP5.1 | length 313
  Top Layer w12: IC1_GP5.3@3958.66,3385.83 3905.09,3385.83 3870.8,3420.12 3870.8,3455.31 3889.18,3473.69 3959.91,3473.69 R4_GP5.1
NetIC1_GP5_4: IC1_GP5.4 R5_GP5.1 | length 289.5
  Top Layer w12: R5_GP5.1 3899.17,3491.69 3881.73,3491.69 3852.8,3462.76 3852.8,3412.67 3905.13,3360.33 3957.02,3360.33 3957.11,3360.24 IC1_GP5.4@3958.66,3360.24
NetIC1_GP5_5: IC1_GP5.5 R6_GP5.1 | length 287.1
  Top Layer w12: R6_GP5.1 3858.27,3493.69 3834.8,3470.22 3834.8,3405.21 3905.36,3334.65 IC1_GP5.5@3958.66,3334.65
NetIC1_GP5_6: IC1_GP5.6 R7_GP5.1 | length 325.8
  Top Layer w12: R7_GP5.1 3816.8,3492.26 3816.8,3397.76 3905.5,3309.05 IC1_GP5.6@3958.66,3309.05
NetIC1_GP5_7: IC1_GP5.7 R8_GP5.1 | length 418.5
  Top Layer w12: R8_GP5.1 3700.79,3515.75 3730.31,3486.22 3789.37,3486.22 3798.8,3476.8 3798.8,3390.3 3905.63,3283.46 IC1_GP5.7@3958.66,3283.46
NetIC1_GP5_15: IC1_GP5.15 R1_GP5.1 | length 209.7
  Top Layer w12: IC1_GP5.15@4226.38,3411.42 4179.88,3411.42 4165.17,3426.13 4165.17,3447.88 4246.81,3529.53 R1_GP5.1
NetIC1_GP6_1: IC1_GP6.1 R2_GP6.1 | length 405.6
  Top Layer w12: IC1_GP6.1 4590.55,3437.01 4612.8,3459.25 4734.76,3459.25 4803.15,3527.64 R2_GP6.1
NetIC1_GP6_2: IC1_GP6.2 R3_GP6.1 | length 384.8
  Top Layer w12: IC1_GP6.2 v2(4602.36,3411.42) ; v2(4724.41,3484.25) R3_GP6.1
  Bottom Layer w12: v2(4602.36,3411.42) 4602.36,3448.82 4612.8,3459.25 4663.98,3459.25 4688.98,3484.25 v2(4724.41,3484.25)
NetIC1_GP6_3: IC1_GP6.3 R4_GP6.1 | length 322.4
  Top Layer w12: IC1_GP6.3 v2(4559.06,3385.83) ; v2(4645.67,3484.25) R4_GP6.1
  Bottom Layer w12: v2(4559.06,3385.83) 4559.06,3433.07 4610.24,3484.25 v2(4645.67,3484.25)
NetIC1_GP6_4: IC1_GP6.4 R5_GP6.1 | length 265.3
  Top Layer w12: IC1_GP6.4 v2(4513.78,3360.24) ; v2(4566.93,3484.25) R5_GP6.1
  Bottom Layer w12: v2@4515.75,3362.2 4531.5,3377.95 4531.5,3448.82 v2(4566.93,3484.25)
NetIC1_GP6_5: IC1_GP6.5 R6_GP6.1 | length 330.9
  Top Layer w12: IC1_GP6.5 4390.51,3334.65 4366.14,3359.01 4366.14,3456.69 4393.7,3484.25 4442.91,3484.25 R6_GP6.1
NetIC1_GP6_6: IC1_GP6.6 R7_GP6.1 | length 312.5
  Top Layer w12: R7_GP6.1 4348.14,3468.22 4348.14,3347.03 4386.11,3309.05 IC1_GP6.6
NetIC1_GP6_7: IC1_GP6.7 R8_GP6.1 | length 320.3
  Top Layer w12: R8_GP6.1 4330.14,3528.96 4330.14,3339.57 4386.25,3283.46 IC1_GP6.7
NetIC1_GP6_15: IC1_GP6.15 R1_GP6.1 | length 226.1
  Top Layer w12: IC1_GP6.15 4763.78,3411.42 R1_GP6.1
NetLD1_GP1_K: LD1_GP1.K R1_GP1.2 | length 80.7
  Top Layer w10: R1_GP1.2 LD1_GP1.K
NetLD1_GP2_K: LD1_GP2.K R1_GP2.2 | length 80.7
  Top Layer w10: R1_GP2.2 LD1_GP2.K
NetLD1_GP3_K: LD1_GP3.K R1_GP3.2 | length 80.7
  Top Layer w10: R1_GP3.2 LD1_GP3.K
NetLD1_GP4_K: LD1_GP4.K R1_GP4.2 | length 80.7
  Top Layer w10: R1_GP4.2 LD1_GP4.K
NetLD1_GP5_K: LD1_GP5.K R1_GP5.2 | length 80.7
  Top Layer w10: R1_GP5.2 LD1_GP5.K
NetLD1_GP6_K: LD1_GP6.K R1_GP6.2 | length 80.7
  Top Layer w10: R1_GP6.2 LD1_GP6.K
NetLD2_GP1_K: LD2_GP1.K R2_GP1.2 | length 80.7
  Top Layer w10: R2_GP1.2 LD2_GP1.K
NetLD2_GP2_K: LD2_GP2.K R2_GP2.2 | length 80.7
  Top Layer w10: R2_GP2.2 LD2_GP2.K
NetLD2_GP3_K: LD2_GP3.K R2_GP3.2 | length 80.7
  Top Layer w10: R2_GP3.2 LD2_GP3.K
NetLD2_GP4_K: LD2_GP4.K R2_GP4.2 | length 80.7
  Top Layer w10: R2_GP4.2 LD2_GP4.K
NetLD2_GP5_K: LD2_GP5.K R2_GP5.2 | length 80.7
  Top Layer w10: R2_GP5.2 LD2_GP5.K
NetLD2_GP6_K: LD2_GP6.K R2_GP6.2 | length 80.7
  Top Layer w10: R2_GP6.2 LD2_GP6.K
NetLD3_GP1_K: LD3_GP1.K R3_GP1.2 | length 80.7
  Top Layer w10: R3_GP1.2 LD3_GP1.K
NetLD3_GP2_K: LD3_GP2.K R3_GP2.2 | length 80.7
  Top Layer w10: R3_GP2.2 LD3_GP2.K
NetLD3_GP3_K: LD3_GP3.K R3_GP3.2 | length 80.7
  Top Layer w10: R3_GP3.2 LD3_GP3.K
NetLD3_GP4_K: LD3_GP4.K R3_GP4.2 | length 80.7
  Top Layer w10: R3_GP4.2 LD3_GP4.K
NetLD3_GP5_K: LD3_GP5.K R3_GP5.2 | length 80.7
  Top Layer w10: R3_GP5.2 LD3_GP5.K
NetLD3_GP6_K: LD3_GP6.K R3_GP6.2 | length 80.7
  Top Layer w10: R3_GP6.2 LD3_GP6.K
NetLD4_GP1_K: LD4_GP1.K R4_GP1.2 | length 80.7
  Top Layer w10: R4_GP1.2 LD4_GP1.K
NetLD4_GP2_K: LD4_GP2.K R4_GP2.2 | length 80.7
  Top Layer w10: R4_GP2.2 LD4_GP2.K
NetLD4_GP3_K: LD4_GP3.K R4_GP3.2 | length 80.7
  Top Layer w10: R4_GP3.2 LD4_GP3.K
NetLD4_GP4_K: LD4_GP4.K R4_GP4.2 | length 80.7
  Top Layer w10: R4_GP4.2 LD4_GP4.K
NetLD4_GP5_K: LD4_GP5.K R4_GP5.2 | length 80.7
  Top Layer w10: R4_GP5.2 LD4_GP5.K
NetLD4_GP6_K: LD4_GP6.K R4_GP6.2 | length 80.7
  Top Layer w10: R4_GP6.2 LD4_GP6.K
NetLD5_GP1_K: LD5_GP1.K R5_GP1.2 | length 80.7
  Top Layer w10: R5_GP1.2 LD5_GP1.K
NetLD5_GP2_K: LD5_GP2.K R5_GP2.2 | length 80.7
  Top Layer w10: R5_GP2.2 LD5_GP2.K
NetLD5_GP3_K: LD5_GP3.K R5_GP3.2 | length 80.7
  Top Layer w10: R5_GP3.2 LD5_GP3.K
NetLD5_GP4_K: LD5_GP4.K R5_GP4.2 | length 80.7
  Top Layer w10: R5_GP4.2 LD5_GP4.K
NetLD5_GP5_K: LD5_GP5.K R5_GP5.2 | length 80.7
  Top Layer w10: R5_GP5.2 LD5_GP5.K
NetLD5_GP6_K: LD5_GP6.K R5_GP6.2 | length 80.7
  Top Layer w10: R5_GP6.2 LD5_GP6.K
NetLD6_GP1_K: LD6_GP1.K R6_GP1.2 | length 80.7
  Top Layer w10: R6_GP1.2 LD6_GP1.K
NetLD6_GP2_K: LD6_GP2.K R6_GP2.2 | length 80.7
  Top Layer w10: R6_GP2.2 LD6_GP2.K
NetLD6_GP3_K: LD6_GP3.K R6_GP3.2 | length 80.7
  Top Layer w10: R6_GP3.2 LD6_GP3.K
NetLD6_GP4_K: LD6_GP4.K R6_GP4.2 | length 80.7
  Top Layer w10: R6_GP4.2 LD6_GP4.K
NetLD6_GP5_K: LD6_GP5.K R6_GP5.2 | length 80.7
  Top Layer w10: R6_GP5.2 LD6_GP5.K
NetLD6_GP6_K: LD6_GP6.K R6_GP6.2 | length 80.7
  Top Layer w10: R6_GP6.2 LD6_GP6.K
NetLD7_GP1_K: LD7_GP1.K R7_GP1.2 | length 80.7
  Top Layer w10: R7_GP1.2 LD7_GP1.K
NetLD7_GP2_K: LD7_GP2.K R7_GP2.2 | length 80.7
  Top Layer w10: R7_GP2.2 LD7_GP2.K
NetLD7_GP3_K: LD7_GP3.K R7_GP3.2 | length 80.7
  Top Layer w10: R7_GP3.2 LD7_GP3.K
NetLD7_GP4_K: LD7_GP4.K R7_GP4.2 | length 80.7
  Top Layer w10: R7_GP4.2 LD7_GP4.K
NetLD7_GP5_K: LD7_GP5.K R7_GP5.2 | length 80.7
  Top Layer w10: R7_GP5.2 LD7_GP5.K
NetLD7_GP6_K: LD7_GP6.K R7_GP6.2 | length 80.7
  Top Layer w10: R7_GP6.2 LD7_GP6.K
NetLD8_GP1_K: LD8_GP1.K R8_GP1.2 | length 80.7
  Top Layer w10: R8_GP1.2 LD8_GP1.K
NetLD8_GP2_K: LD8_GP2.K R8_GP2.2 | length 80.7
  Top Layer w10: R8_GP2.2 LD8_GP2.K
NetLD8_GP3_K: LD8_GP3.K R8_GP3.2 | length 80.7
  Top Layer w10: R8_GP3.2 LD8_GP3.K
NetLD8_GP4_K: LD8_GP4.K R8_GP4.2 | length 80.7
  Top Layer w10: R8_GP4.2 LD8_GP4.K
NetLD8_GP5_K: LD8_GP5.K R8_GP5.2 | length 80.7
  Top Layer w10: R8_GP5.2 LD8_GP5.K
NetLD8_GP6_K: LD8_GP6.K R8_GP6.2 | length 80.7
  Top Layer w10: R8_GP6.2 LD8_GP6.K
STR: IC1_GP1.12 IC1_GP2.12 IC1_GP3.12 IC1_GP4.12 IC1_GP5.12 IC1_GP6.12 J2.1 J9.1 | length 4555.7
  Top Layer w10: J9.1 1329.27,3296.72 1329.27,3255.7 1346.26,3238.72 1551.73,3238.72 1574.8,3261.79 1574.8,3305.44 1605.97,3336.61 IC1_GP1.12 1772.63,3336.61 1880.89,3228.35 2167,3228.35 2194.35,3255.7 2194.35,3291.46 2239.51,3336.61 IC1_GP2.12 ; IC1_GP2.12@2336.61,3334.65 2402.55,3334.65 2510.82,3226.38 2796.92,3226.38 2824.28,3253.74 2824.28,3289.49 2869.43,3334.65 3032.47,3334.65 3140.74,3226.38 3426.84,3226.38 3454.2,3253.74 3454.2,3289.49 3499.35,3334.65 3662.39,3334.65 3770.66,3226.38 4056.76,3226.38 4084.12,3253.74 4084.12,3289.49 4129.27,3334.65 IC1_GP5.12 4287.4,3334.65 4317.2,3304.84 4317.2,3231.03 4343.77,3204.47 4547.99,3204.47 4621.8,3278.28 4621.8,3298.96 4657.48,3334.65 IC1_GP6.12 4783.46,3334.65 4822.83,3374.02 4822.83,3401.57 4866.14,3444.88 J2.1
VCC: C1_GP1.2 C1_GP2.2 C1_GP3.2 C1_GP4.2 C1_GP5.2 C1_GP6.2 C2_GP1.2 C2_GP2.2 C2_GP3.2 C2_GP4.2 C2_GP5.2 C2_GP6.2 IC1_GP1.16 IC1_GP2.16 IC1_GP3.16 IC1_GP4.16 IC1_GP5.16 IC1_GP6.16 J4.1 J6.1 LD1_GP1.A LD1_GP2.A LD1_GP3.A LD1_GP4.A LD1_GP5.A LD1_GP6.A LD2_GP1.A LD2_GP2.A LD2_GP3.A LD2_GP4.A LD2_GP5.A LD2_GP6.A LD3_GP1.A LD3_GP2.A LD3_GP3.A LD3_GP4.A LD3_GP5.A LD3_GP6.A LD4_GP1.A LD4_GP2.A LD4_GP3.A LD4_GP4.A LD4_GP5.A LD4_GP6.A LD5_GP1.A LD5_GP2.A LD5_GP3.A LD5_GP4.A LD5_GP5.A LD5_GP6.A LD6_GP1.A LD6_GP2.A LD6_GP3.A LD6_GP4.A LD6_GP5.A LD6_GP6.A LD7_GP1.A LD7_GP2.A LD7_GP3.A LD7_GP4.A LD7_GP5.A LD7_GP6.A LD8_GP1.A LD8_GP2.A LD8_GP3.A LD8_GP4.A LD8_GP5.A LD8_GP6.A | length 3049.1
  Top Layer w12: IC1_GP1.16 1732.28,3464.57 v2(1732.28,3472.44) ; IC1_GP2.16 2362.2,3452.76 v2(2362.2,3476.38) ; IC1_GP3.16 2992.13,3450.79 v2(2992.13,3476.38) ; IC1_GP4.16 3622.05,3450.79 v2(3622.05,3476.38) ; IC1_GP5.16 4251.97,3450.79 v2(4251.97,3476.38) ; IC1_GP6.16 4751.97,3437.01 v2(4771.65,3456.69)
  Top Layer w24: C2_GP1.2 1675.2,3866.14 v2(1732.28,3866.14) ; C2_GP2.2 v2(2362.2,3870.08) ; C2_GP3.2 2935.04,3870.08 v2(2992.13,3870.08) ; C2_GP4.2 3564.96,3870.08 v2(3622.05,3870.08) ; C2_GP5.2 4194.88,3870.08 v2(4251.97,3870.08) ; C2_GP6.2 4686.88,3870.08 v2(4744.09,3870.08)
  Bottom Layer w24: v2(1732.28,3472.44) v2(1732.28,3866.14) ; v2(2362.2,3476.38) v2(2362.2,3870.08) ; v2(2992.13,3476.38) v2(2992.13,3870.08) ; v2(3622.05,3476.38) v2(3622.05,3870.08) ; v2(4251.97,3476.38) v2(4251.97,3870.08) ; v2(4744.09,3870.08) 4771.65,3842.52 v2(4771.65,3456.69)

## Polygon pours and split planes (outlines as drawn)
GND on Top Layer "Top Layer-No Net" (solid, pour order 4): 1141.73,3976.38 1143.7,3974.41 4921.26,3974.41 4921.26,3147.64 4919.29,3149.61 1141.73,3149.61 1141.73,3976.38
VCC on Top Layer "Top Layer-VCC bus bar" (solid, pour order 2): 1141.73,3976.38 1141.73,3730.32 4917.32,3730.32 4917.32,3976.38 1141.73,3976.38
GND on Bottom Layer "Top Layer-No Net" (solid, pour order 6): 1141.73,3976.38 1141.73,3149.61 4921.26,3149.61 4921.26,3976.38 1141.73,3976.38

## Silkscreen, mask and mechanical layers (free items; w line width, h text height)
Top Overlay:
  lines w7.87: 1771.65,3435.04 1771.65,3503.94 ; 2401.57,3454.72 2401.57,3503.94 ; 3031.5,3454.72 3031.5,3503.94 ; 3661.42,3454.72 3661.42,3503.94 ; 4291.34,3454.72 4291.34,3503.94 ; 4832.68,3257.87 4842.52,3257.87 4852.36,3267.72
  text "16" at 2421.26,3444.88 h30
  text "24" at 3051.18,3444.88 h30
  text "32" at 3681.1,3444.88 h30
  text "40" at 4311.02,3444.88 h30
  text "8" at 1791.34,3435.04 h30
  text "jaseg 2015" at 1988.19,3179.13 h42
  text "released cc-by-sa" at 2568.9,3179.13 h42
Bottom Overlay:
  drawing of 952 lines, arcs and shapes, not listed
Mechanical 1:
  lines w11.81: 1122.05,3127.95 4940.94,3127.95 ; 1122.05,3129.92 1122.05,3996.06 4940.94,3996.06 4940.94,3129.92

## Dimensions
1122.05,3129.92 to 1122.05,3996.06 on Top Layer
1122.05,3996.06 to 4940.94,3996.06 on Top Layer